# Altium PCB BeaglePhone_Rev1_PCB.PcbDoc
Units mil, origin at the board's own origin, x right, y up, seen from the top; angles counter-clockwise.
Board outline 2150 x 3400 mil, 4 copper layers (Top Layer, GND1, GND2, Bottom Layer); 59 components, 47 nets, 301 pads, 43 vias.
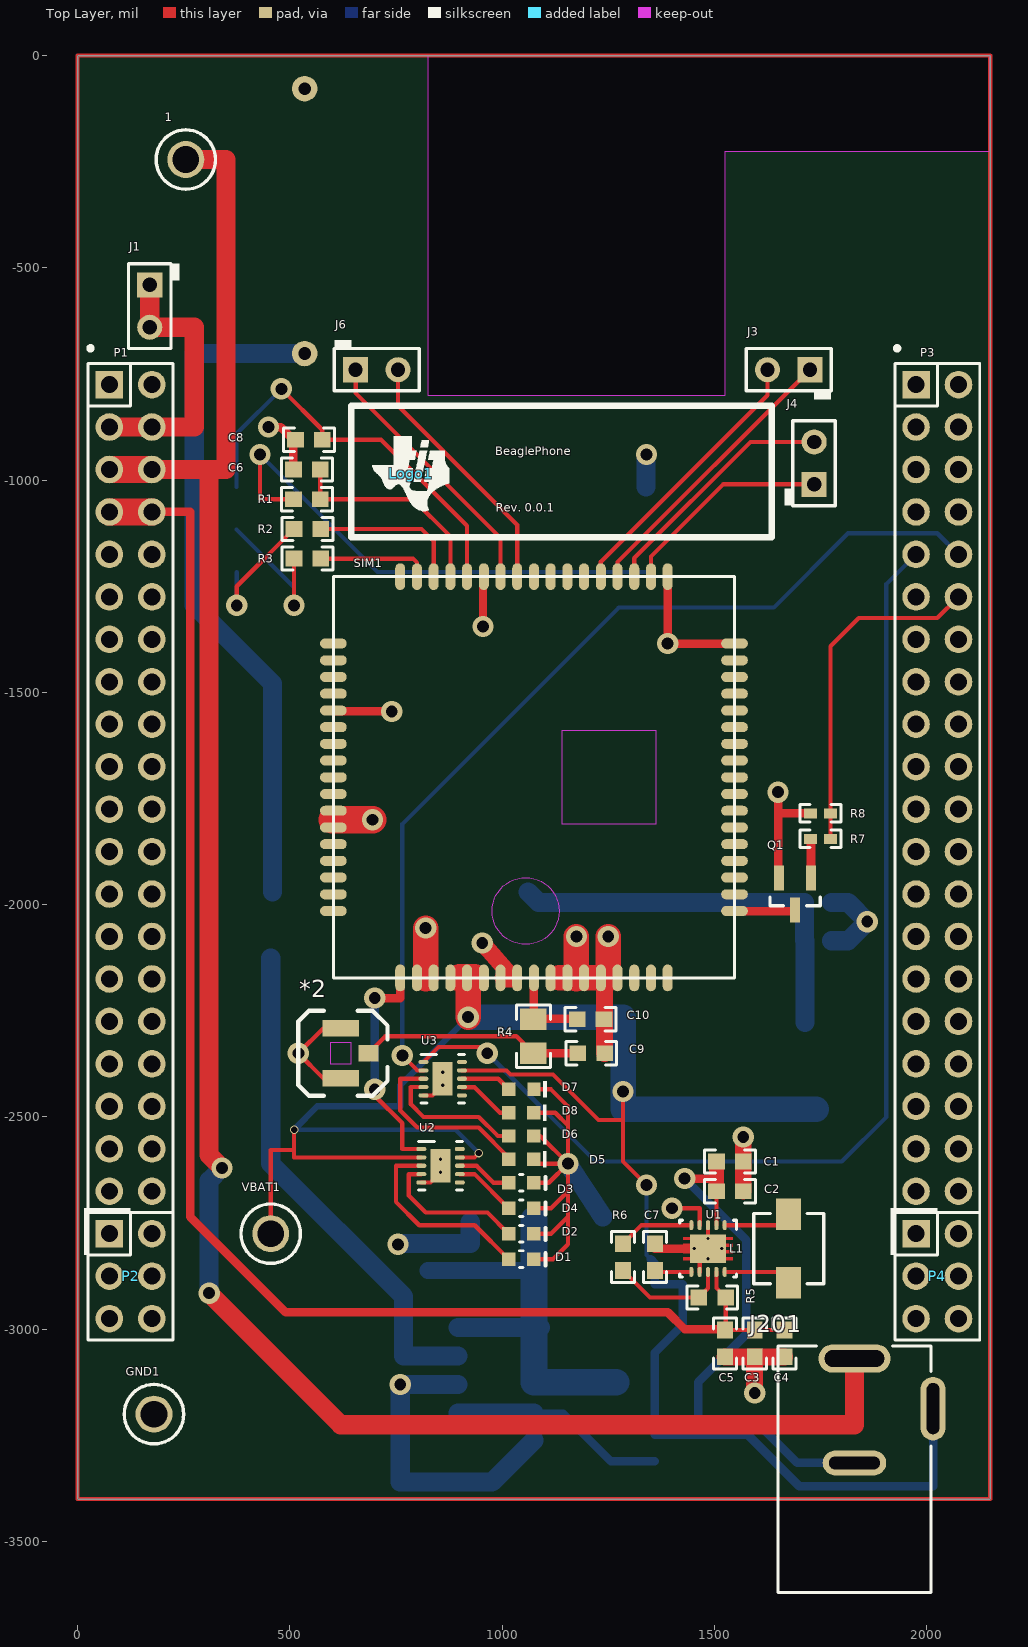
[diagram p0: Top Layer view]
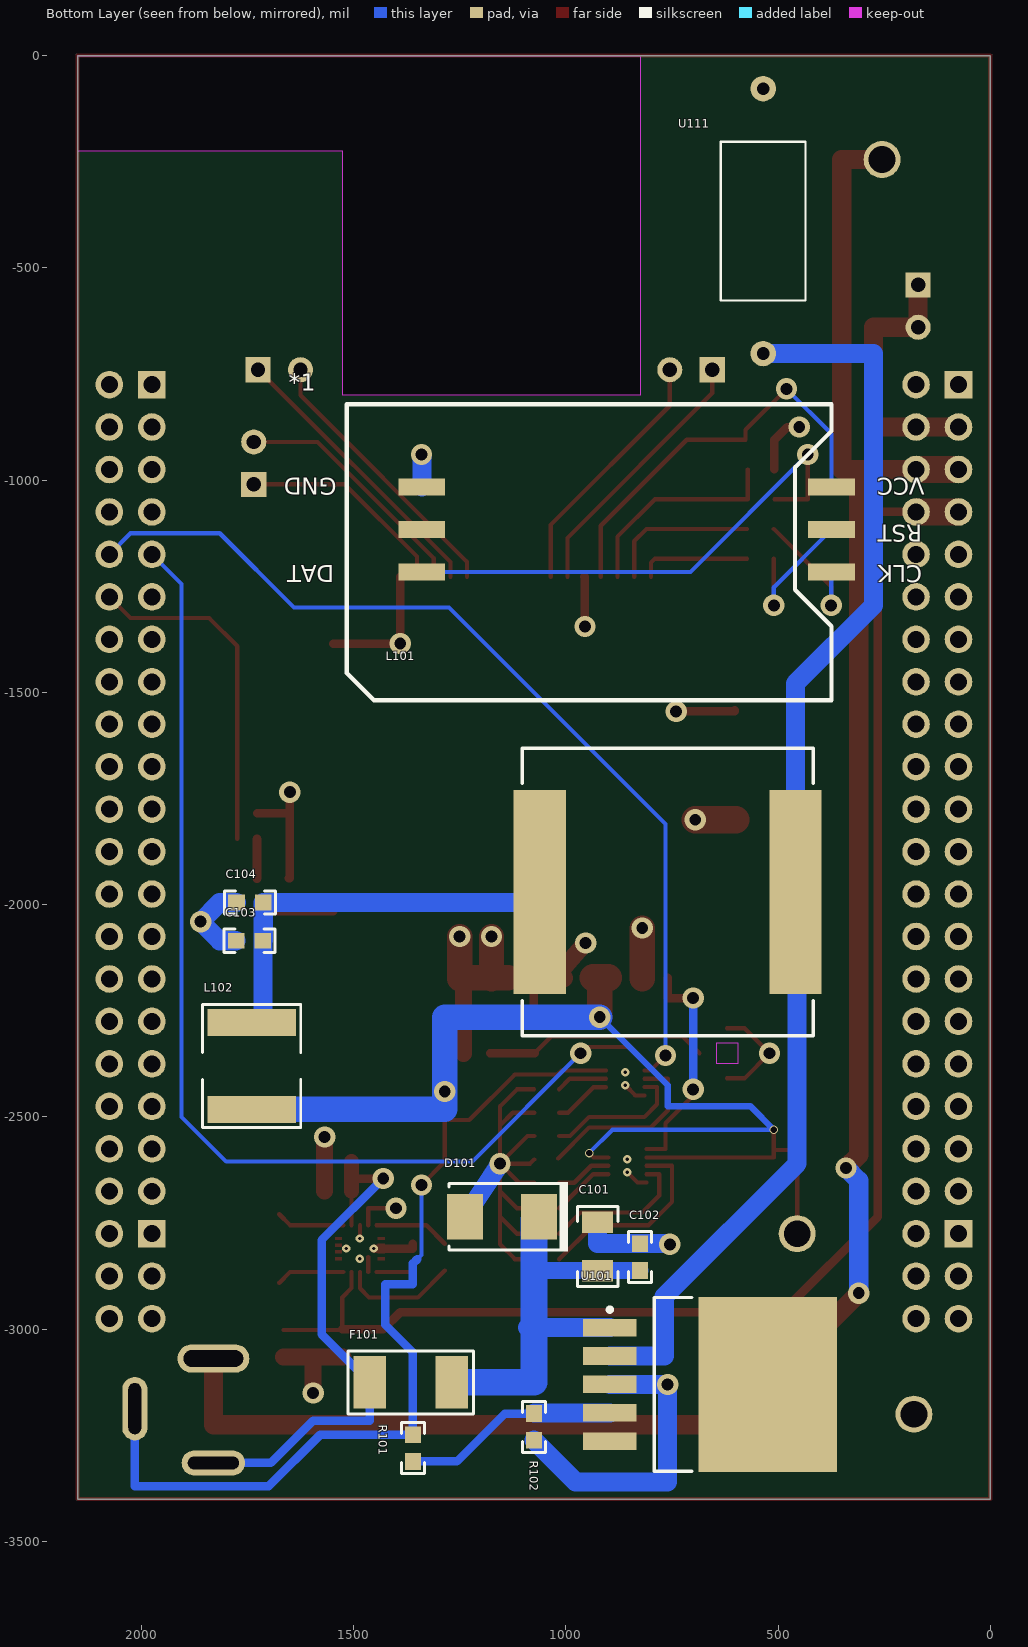
[diagram p1: Bottom Layer view, seen from below]
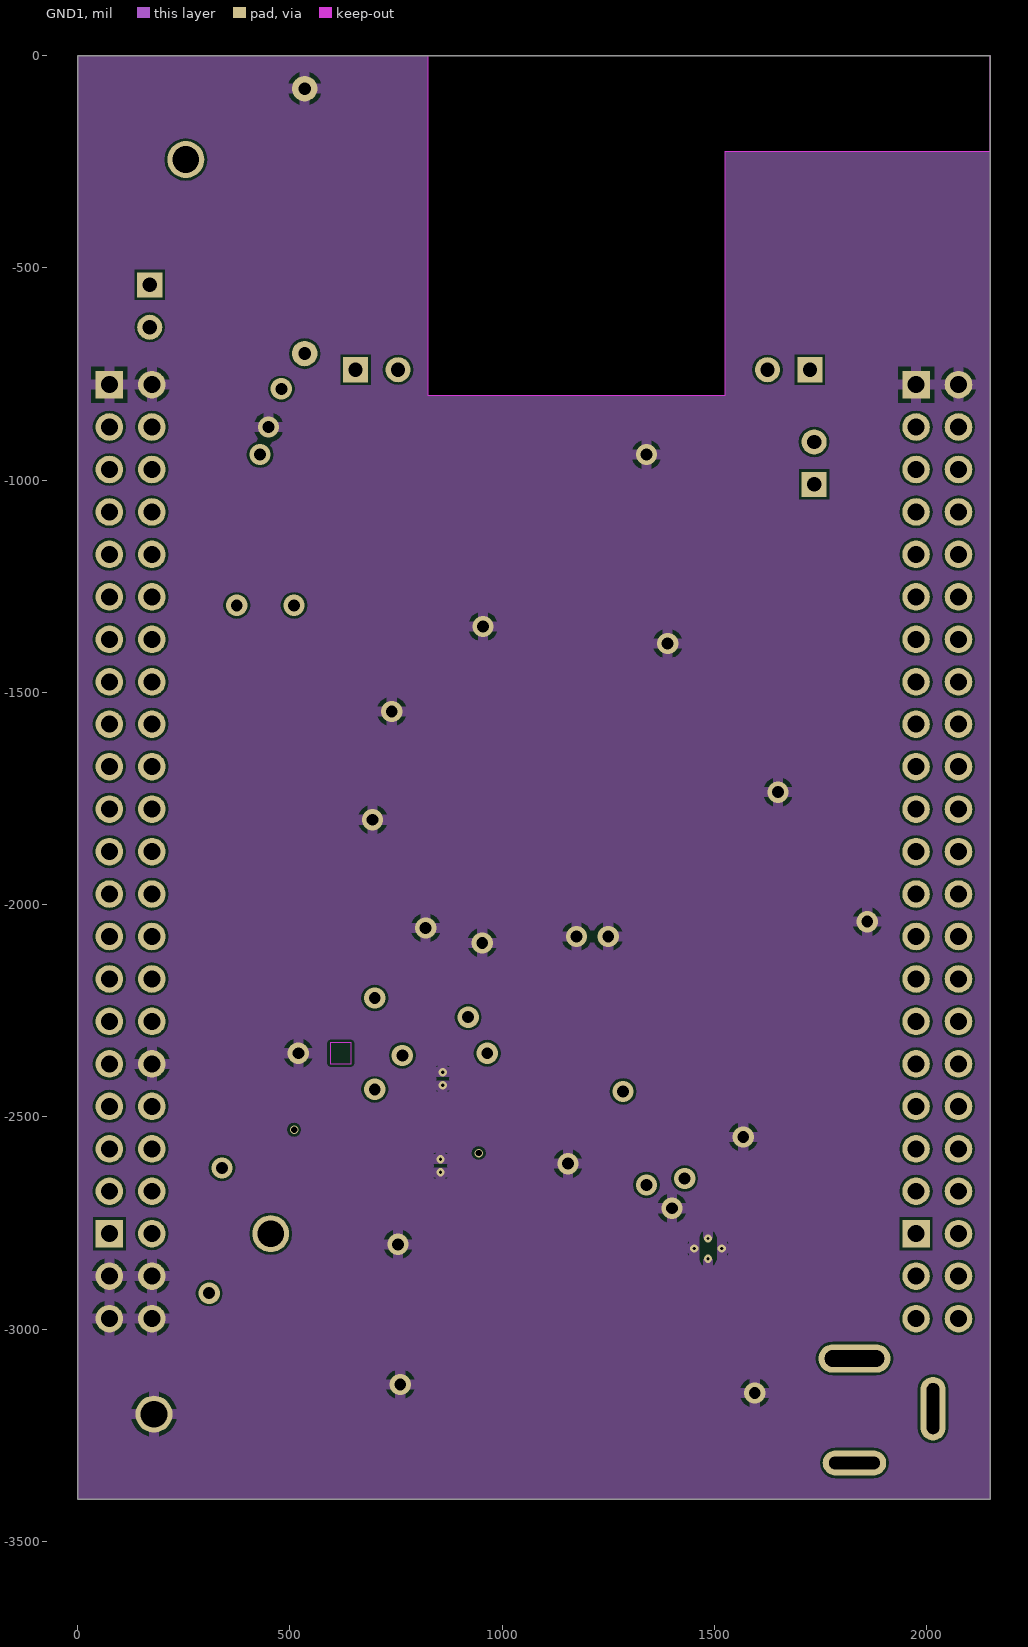
[diagram p2: GND1]
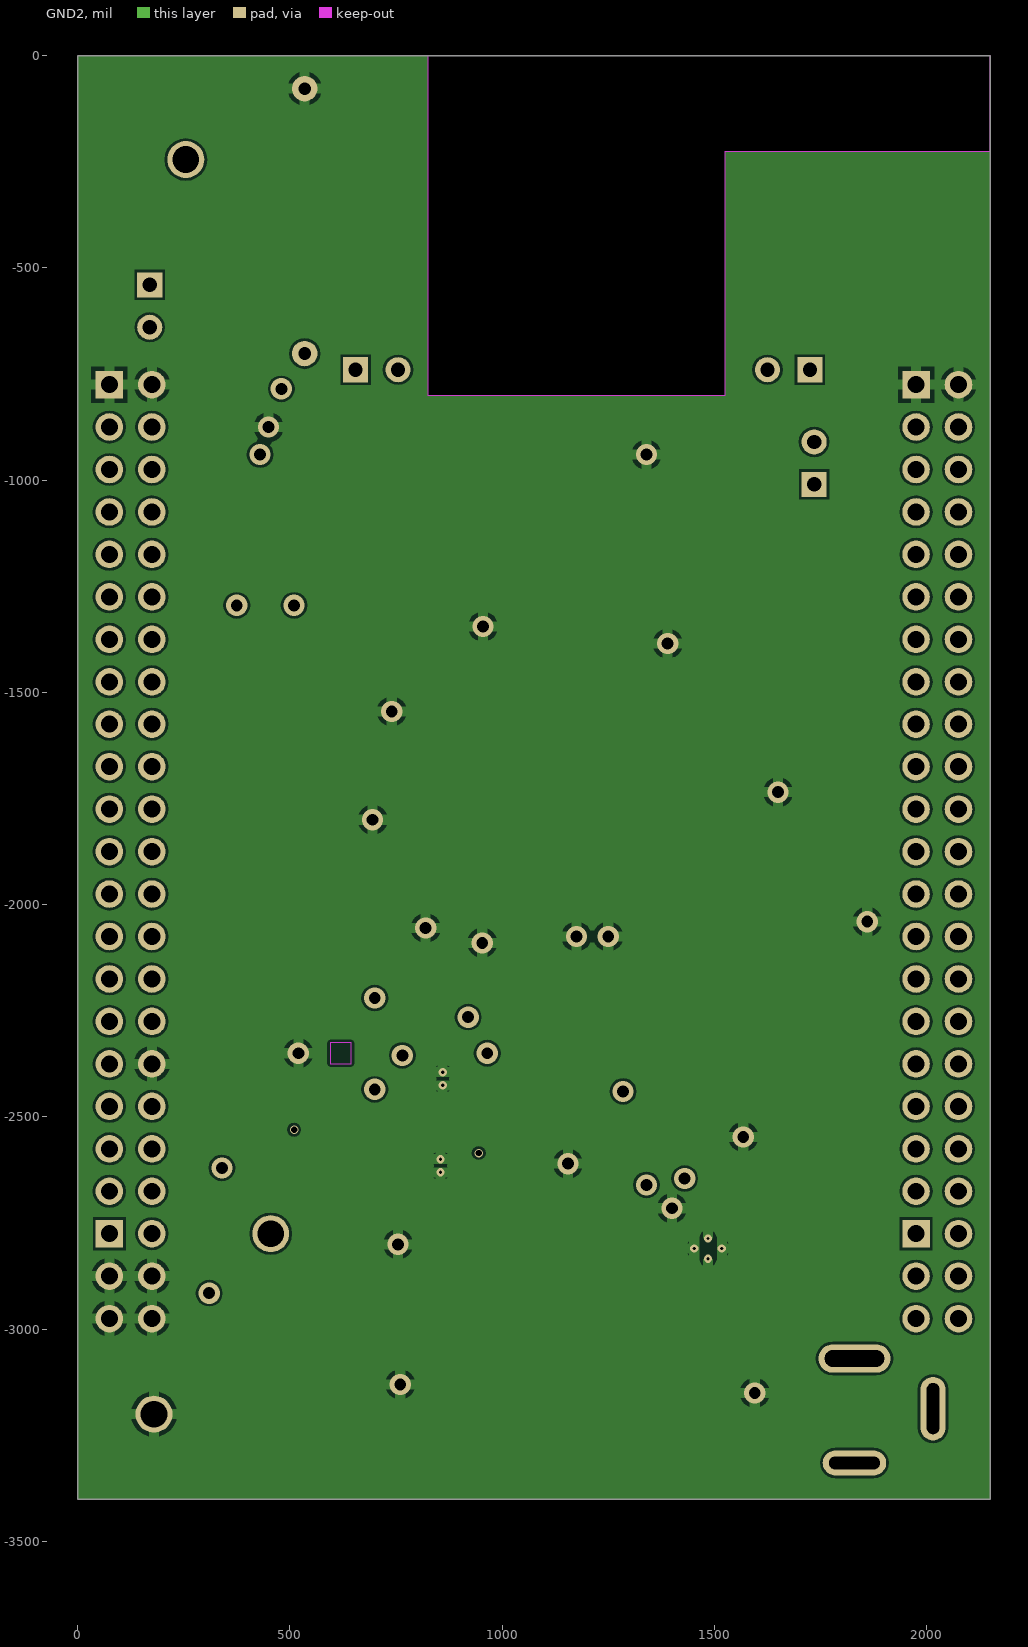
[diagram p3: GND2]

## Layer stack, top to bottom
Top Layer: signal copper 1.4
Dielectric: core 12.6, FR-4, Dk 4.8
GND1: signal copper 1.4
Dielectric: prepreg 12.6, FR-4, Dk 4.8
GND2: signal copper 1.4
Dielectric: core 12.6, FR-4, Dk 4.8
Bottom Layer: signal copper 1.4

## Board outline
0,-3400 0,0 2150,0 2150,-3400
cut-out: 825,0 825,-800 1525,-800 1525,-225 2150,-225 2150,0

## Design rules (kind name [scope] priority, off if disabled: settings)
AssemblyTestPointUsage [All] p1 off:
AssemblyTestpoint [All] p1 off: testpointundercomponent=TRUE minsize=40 maxsize=100 preferedsize=60 minholesize=0 maxholesize=40 preferedholesize=32 testpointgrid=1 usegrid=TRUE gridtolerance=0.01 allowsidetop=TRUE allowsidebottom=TRUE
Clearance [All] p1: gap=6
ComponentClearance [All] p1 off: gap=10 collisioncheckmode=3 verticalgap=10 showdistances=FALSE
DiffPairsRouting [All] p1 off: maxlimit=10 minlimit=10 mostfreqgap=10 maxuncoupledlength=500
FabricationTestPointUsage TestPointUsage [All] p1 off: valid=0 allowmultiple=FALSE
FabricationTestpoint Testpoint [All] p1 off: side=3 testpointundercomponent=TRUE minsize=40 maxsize=100 preferedsize=60 minholesize=0 maxholesize=40 preferedholesize=32 testpointgrid=1 allowsidetop=TRUE allowsidebottom=TRUE usegrid=TRUE gridtolerance=0.01
FanoutControl Fanout_BGA [IsBGA] p1 off: bgadir=Out bgaviamode=Centered fanoutstyle=Auto fanoutdirection=Alternating viagrid=1 // Fanout_BGA (Default Rule)
FanoutControl Fanout_LCC [IsLCC] p2 off: bgadir=Out bgaviamode=Centered fanoutstyle=Auto fanoutdirection=Alternating viagrid=1 // Fanout_LCC (Default Rule)
FanoutControl Fanout_SOIC [IsSOIC] p3 off: bgadir=Out bgaviamode=Centered fanoutstyle=Auto fanoutdirection=Alternating viagrid=1 // Fanout_SOIC (Default Rule)
FanoutControl Fanout_Small [(CompPinCount < 5)] p4 off: bgadir=Out bgaviamode=Centered fanoutstyle=Auto fanoutdirection=OutThenIn viagrid=1 // Fanout_Small (Default Rule)
FanoutControl Fanout_Default [All] p5 off: bgadir=Out bgaviamode=Centered fanoutstyle=Auto fanoutdirection=Alternating viagrid=1 // Fanout_Default (Default Rule)
Height [All] p1 off: minheight=0 maxheight=1000 prefheight=500
HoleSize [All] p1: absolutevalues=TRUE maxlimit=400 minlimit=15 maxpercent=80.000 minpercent=20.000
HoleToHoleClearance [All] p1: gap=8 allowstackedmicrovias=TRUE
LayerPairs [All] p1 off: enforce=FALSE
MinimumSolderMaskSliver [All] p1: minsoldermaskwidth=4
PolygonConnect [All] p1: connectstyle=Relief reliefconductorwidth=25 reliefentries=4 polygonreliefangle="90 Angle" airgapwidth=10
RoutingVias [All] p1: holewidth=15 width=25 viastyle="Through Hole" minholewidth=15 minwidth=25 maxholewidth=400 maxwidth=500
SilkToSilkClearance [All] p1: silktosilkclearance=5
SilkscreenOverComponentPads [All] p1: minsilkscreentomaskgap=5
SolderMaskExpansion [All] p1: expansion=2
Width [All] p1: maxlimit=100 minlimit=6 preferedwidth=10
10 further rules are at their usual default settings.

## Classes and differential pairs
component class Logo: Logo1
component class Header: P1 P2 P3 P4

## Components (designator, comment, footprint, x,y, rotation, side; value= is the part's Value field where it differs from the comment)
1 "5005" Keystone5005 255,-245 r90 top
*1 "sim_holder" SIM_socket 945,-1170 r0 bottom
*2 "ipx" IPX_U.FL 620,-2350 r90 top
C1 "C1608X5R1A106M" 0603 1536.5,-2605 r180 top
C2 "C1608X5R1A106M" 0603 1536.5,-2675 r180 top
C3 "C1608X5R0G226M080AA" 0603 1595,-3033.5 r90 top
C4 "C1608X5R0G226M080AA" 0603 1665,-3033.5 r90 top
C5 "C1608X5R0G226M080AA" 0603 1525,-3033.5 r90 top
C6 "GRM1885C2A220JA01D" 0603 540,-975 r180 top
C7 "C0603X104K3RACTU" 0603 1360,-2830 r90 top
C8 "06035C104KAT2A" 0603 545,-905 r180 top
C9 "C0603C109C5GACTU" 0603 1210,-2350 r0 top
C10 "C0603C109C5GACTU" 0603 1208.5,-2270 r0 top
C101 "GRM31CR60J107ME39L" 1206 925,-2805 r90 bottom
C102 "GRM188R61A105KA61D" 0603 825,-2830 r90 bottom
C103 "GRM188R71H332KA01D" 0603 1745,-2085 r0 bottom
C104 "C0603X104K4RACTU" 0603 1744.06,-1995 r0 bottom
D1 "LG L29K-G2J1-24-Z" "LG L29K_GREEN" 1045,-2835 r0 top
D2 "LG L29K-G2J1-24-Z" "LG L29K_GREEN" 1045,-2775 r0 top
D3 "LG L29K-G2J1-24-Z" "LG L29K_GREEN" 1045,-2655 r0 top
D4 "LG L29K-G2J1-24-Z" "LG L29K_GREEN" 1045,-2715 r0 top
D5 "LB Q39G-L2N2-35-1" "LB Q39G_BLUE" 1045,-2600 r0 top
D6 "LB Q39G-L2N2-35-1" "LB Q39G_BLUE" 1045,-2545 r0 top
D7 "LB Q39G-L2N2-35-1" "LB Q39G_BLUE" 1045.47,-2435 r0 top
D8 "LB Q39G-L2N2-35-1" "LB Q39G_BLUE" 1045,-2490 r0 top
D101 "SMBJ15A-13-F" SMB 1150,-2735 r0 bottom
F101 "0452005." SloBlo452 1365,-3125 r0 bottom
GND1 "5006" Keystone5006 180,-3200 r90 top
J1 "800-10-002-10-001000" Mill-Max_800-10-002-10-001000 170,-590 r270 top
J3 "800-10-002-10-001000" Mill-Max_800-10-002-10-001000 1675,-740 r180 top
J4 "800-10-002-10-001000" Mill-Max_800-10-002-10-001000 1735,-960 r90 top
J6 "800-10-002-10-001000" Mill-Max_800-10-002-10-001000 705,-740 r0 top
J201 "RAPC722X" CONN_RAPC722X 1830,-3610 r270 top
L1 "SRP4012-1R0M" SRP4012 1675,-2810 r270 top
L101 "IHLP6767GZER101M11" IHLP-6767GZ-11 760,-1970 r0 bottom
L102 "HI2220P271R-10" 2220 1740,-2380 r270 bottom
Logo1 "Texas Instruments" TI_Symbol_Overlay_Small 785,-985 r0 top
P1 "Comment" TSW-120-07-G-D 125,-1725 r270 top locked
P2 "Comment" SULLINS_PEC03DAAN 125,-2875 r270 top locked
P3 "Comment" TSW-120-07-G-D 2025,-1725 r270 top locked
P4 "Comment" SULLINS_PEC03DAAN 2025,-2875 r270 top locked
Q1 "MMBT2222LT1G" SOT-23 1690,-1975 r270 top
R1 "CRCW060322R0JNEA" 0603 540,-1045 r180 top
R2 "CRCW060322R0JNEA" 0603 541.5,-1115 r0 top
R3 "CRCW060322R0JNEA" 0603 541.5,-1185 r0 top
R4 "CRCW08050000Z0EAHP" 0805_HV 1073.5,-2310 r90 top
R5 "CRCW06031M00FKEA" 0603 1495,-2925 r0 top
R6 "RT0603BRD07111KL" 0603 1285,-2830 r270 top
R7 "CRCW04024K70JNED" 0402 1750,-1845 r180 top
R8 "CRCW04024K70JNED" 0402 1750,-1785 r0 top
R101 "CRCW06032K20JNEA" 0603 1360,-3280 r90 bottom
R102 "CRCW06031K00JNEA" 0603 1075,-3230 r90 bottom
SIM1 "SIM900" "PCBComponent_1 - duplicate1" 1075,-1700 r180 top
U1 "TPS63061DSC" DSC0010E 1485,-2810 r270 top
U2 "TPS75105DSKR" DSK0010A 855,-2615 r0 top
U3 "TPS75105DSKR" DSK0010A 860,-2410 r0 top
U101 "LM2596S-ADJ" TS5B_N 660,-3130 r180 bottom
U111 "Used in BOM report" "PCBComponent_1 - duplicate2" 535,-390 r270 bottom
VBAT1 "5005" Keystone5005 455,-2775 r90 top

## Footprints (in the part's own frame and the unit in brackets; to place one, negate y for a bottom-side part, rotate by r counter-clockwise, add the part's x,y. Pads: shape width x height; smd on the part's side, far side on the other; paste and mask are expansions set on the pad)
0402 [mm] "0402 from SM-752 data"
  rect 0.8x0.6 smd: 1(-0.6,0) 2(0.6,0)
  silkscreen extent -1.22,-0.52 1.22,0.52, body extent -0.55,-0.3 0.55,0.3, height 0.6
0603 [mm] "0603 from SM-752 data"
  rect 1x0.95 smd: 1(-0.8,0) 2(0.8,0)
  silkscreen extent -1.52,-0.69 1.52,0.69, body extent -0.87,-0.47 0.87,0.47, height 0.85
0805_HV [mil] "0805 with 30mil clearance between pads"
  rect 50x63 smd: 1(-40,0) 2(40,0)
  silkscreen extent -74,-40 74,40, body extent -43,-29 43,29, height 43
1206 [mm] "1206 from SM-752 data"
  rect 1.3x1.85 smd: 1(-1.45,0) 2(1.45,0)
  silkscreen extent -2.4,-1.21 2.4,1.21, body extent -1.7,-0.9 1.7,0.9, height 1.35
2220 [mm] "Chip Capacitor, Body 5.7x5.0mm, IPC Medium Density"
  rect 1.6x5.3 smd: 1(-2.6,0) 2(2.6,0)
  silkscreen extent -3.69,-2.94 3.69,2.94, body extent -2.95,-2.62 2.95,2.62, height 1.35
CONN_RAPC722X [mm] "Conn_DC Jack"
  oval 1.7x4.3 hole 1.01 slot 3.56 at 90 deg: 1(-13.741,0)
  oval 1.5x3.8 hole 0.76 slot 3.05 at 90 deg: 2(-7.493,0)
  oval 3.8x1.5 hole 0.76 slot 3.05 at 0 deg: 3(-10.744,4.7)
  silkscreen extent -14.48,-4.57 0.25,4.57, body extent -14.5,-4.57 0.23,4.83, height 11.18
DSC0010E [mm]
  oval 0.6x0.24 smd: 1(-1.4,1) 2(-1.4,0.5) 3(-1.4,0) 4(-1.4,-0.5) 5(-1.4,-1) 6(1.4,-1) 7(1.4,-0.5) 8(1.4,0) 9(1.4,0.5) 10(1.4,1)
  rect 1.7x2.15 smd paste-1: 11(0,0)
  Top Layer region: -0.7,-1.5 -0.5,-1.5 -0.5,-1.06 -0.7,-1.06
  Top Layer region: -0.3,-1.5 -0.1,-1.5 -0.1,-1.06 -0.3,-1.06
  Top Layer region: 0.3,-1.06 0.1,-1.06 0.1,-1.5 0.3,-1.5
  Top Layer region: 0.7,-1.06 0.5,-1.06 0.5,-1.5 0.7,-1.5
  Top Layer region: 0.7,1.5 0.5,1.5 0.5,1.06 0.7,1.06
  Top Layer region: 0.3,1.5 0.1,1.5 0.1,1.06 0.3,1.06
  Top Layer region: -0.3,1.06 -0.1,1.06 -0.1,1.5 -0.3,1.5
  Top Layer region: -0.7,1.06 -0.5,1.06 -0.5,1.5 -0.7,1.5
  silkscreen extent -1.7,-1.7 1.7,1.7, body extent -1.58,-1.58 1.58,1.58, height 0.81
DSK0010A [mm] "SON, 10-Leads, Body 2.5x2.5mm, Pitch 0.5mm, Thermal Pad 2x1.2mm - ADI"
  oval 0.6x0.25 smd: 1(-1.15,1) 2(-1.15,0.5) 3(-1.15,0) 4(-1.15,-0.5) 5(-1.15,-1) 6(1.15,-1) 7(1.15,-0.5) 8(1.15,0) 9(1.15,0.5) 10(1.15,1)
  rect 1.2x2 smd paste-0.6: 11(0,0)
  silkscreen extent -1.3,-1.45 1.3,1.45, body extent -1.3,-1.3 1.3,1.3, height 0.81
IHLP-6767GZ-11 [mm] "Vishay Dale"
  rect 3.125x12.19 smd: 1(-7.65,0) 2(7.65,0)
  silkscreen extent -8.7,-8.6 8.7,8.6, body extent -8.64,-8.57 8.64,8.57, height 7
IPX_U.FL [mm]
  rect 1x2.2 smd: 1(-1.5,0) 2(1.5,0)
  rect 1x1.2 smd: 3(0,-1.651)
  Keep-Out Layer region: -0.635,-0.635 0.635,-0.635 0.635,0.635 -0.635,0.635
  silkscreen extent -2.54,-2.79 2.54,2.54
Keystone5005 [mil] "Keystone Compact loops"
  round 87 hole 63: 1(0,0)
  silkscreen extent -70,-70 70,70, body extent -63,-63 62,63, height 225
Keystone5006 [mil] "Keystone Compact loops"
  round 87 hole 63: 1(0,0)
  silkscreen extent -70,-70 70,70, body extent -63,-63 62,63, height 225
"LB Q39G_BLUE" [mm] "OSRAM"
  rect 0.8x0.8 smd: 1(-0.75,0) 2(0.75,0)
  silkscreen extent 1.3,-0.5 1.52,0.5, body extent -0.85,-0.45 0.85,0.45, height 0.4
"LG L29K_GREEN" [mm] "OSRAM"
  rect 0.8x0.8 smd paste-0.4: 1(-0.75,0) 2(0.75,0)
  silkscreen extent -0.1,-0.5 1.45,0.5, body extent -0.9,-0.45 0.9,0.45, height 0.67
Mill-Max_800-10-002-10-001000 [mm] "Mill-Max"
  rect 1.5x1.5 hole 0.85: 1(-1.27,0)
  round 1.5 hole 0.85: 2(1.27,0)
  silkscreen extent -2.54,-1.27 2.54,1.78, body extent -2.54,-1.27 2.54,1.27, height 8.13
"PCBComponent_1 - duplicate1" [mm]
  oval 1.6x0.6 smd: 1(-12,8) 2(-12,7) 3(-12,6) 4(-12,5) 5(-12,4) 6(-12,3) 7(-12,2) 8(-12,1) 9(-12,0) 10(-12,-1) 11(-12,-2) 12(-12,-3) 13(-12,-4) 14(-12,-5) 15(-12,-6) 16(-12,-7) 17(-12,-8) 35(12,-8) 36(12,-7) 37(12,-6) 38(12,-5) 39(12,-4) 40(12,-3) 41(12,-2) 42(12,-1) 43(12,0) 44(12,1) 45(12,2) 46(12,3) 47(12,4) 48(12,5) 49(12,6) 50(12,7) 51(12,8)
  oval 0.6x1.6 smd: 18(-8,-12) 19(-7,-12) 20(-6,-12) 21(-5,-12) 22(-4,-12) 23(-3,-12) 24(-2,-12) 25(-1,-12) 26(0,-12) 27(1,-12) 28(2,-12) 29(3,-12) 30(4,-12) 31(5,-12) 32(6,-12) 33(7,-12) 34(8,-12) 52(8,12) 53(7,12) 54(6,12) 55(5,12) 56(4,12) 57(3,12) 58(2,12) 59(1,12) 60(0,12) 61(-1,12) 62(-2,12) 63(-3,12) 64(-4,12) 65(-5,12) 66(-6,12) 67(-7,12) 68(-8,12)
  Top Layer keep-out region: -7.3,-2.8 -7.3,2.8 -1.7,2.8 -1.7,-2.8
  Top Layer keep-out region: -1.5,8 -1.5,8 -1.348,8.765 -0.914,9.414 -0.265,9.848 0.5,10 0.5,10 1.265,9.848 1.914,9.414 2.348,8.765 2.5,8 2.5,8 2.348,7.235 1.914,6.586 1.265,6.152 0.5,6 0.5,6 0.5,6 -0.265,6.152 -0.914,6.586 -1.348,7.235 -1.5,8
  silkscreen extent -12,-12 12,12
"PCBComponent_1 - duplicate2" [mil]
  round 60 hole 30: 1(312,0) 2(-312,0)
  silkscreen extent -187,-100 187,100
SIM_socket [mm]
  rect 2.8x1 smd: 1(10.011,-3.9) 2(10.011,-1.36) 3(10.011,1.18) 4(-14.5,1.18) 5(-14.5,-1.36) 6(-14.5,-3.9)
  silkscreen extent -14.5,-8.85 14.5,8.85
SloBlo452 [mm] "Littelfuse 452/4 Fuses, recommended land pattern"
  rect 1.96x3.15 smd: 1(-2.455,0) 2(2.455,0)
  silkscreen extent -3.75,-1.88 3.75,1.9, body extent -3.05,-1.35 3.05,1.34, height 2.69
SMB [mil] "Molded Diode, 2-Leads, Body 5.4x3.6mm, IPC Medium Density, based on OnSemi component dimensions"
  rect 85x107.99 smd: 1(-87.01,0) 2(87.01,0)
  silkscreen extent -155,-82 125,82, body extent -106,-71 106,71, height 91
SOT-23 [mm] "SOT23, 3-Leads, Body 2.9x1.3mm, Pitch 0.95mm, Lead Span 2.5mm, IPC Medium Density"
  rect 1.5x0.6 smd: 1(-0.95,0.95) 2(-0.95,-0.95) 3(0.95,0)
  silkscreen extent 0.2,-1.5 0.7,1.5, body extent -1.16,-1.45 1.21,1.45, height 1
SRP4012 [mm] "BOURNS"
  rect 1.9x1.5 smd: 1(-2.05,0) 2(2.05,0)
  silkscreen extent -2.1,-2.1 2.1,2.1, body extent -2.1,-2.1 2.1,2.1, height 1.2
SULLINS_PEC03DAAN [mm] "SULLINS"
  rect 1.65x1.65 hole 1.016 mask+0: 1(-2.54,-1.27)
  round 1.65 hole 1.016 mask+0: 2(-2.54,1.27) 3(0,-1.27) 4(0,1.27) 5(2.54,-1.27) 6(2.54,1.27)
  silkscreen extent -4.06,-2.79 3.81,2.54, body extent -3.81,-2.54 3.81,2.54, height 8.38
TI_Symbol_Overlay_Small [mil]
  silkscreen extent -90,-88 91,88
TS5B_N [mm] "D2-PAK, 6-Leads, Body 8.6x10.2mm, Pitch 1.7mm, Lead Span 14.1mm, IPC Medium Density"
  rect 3.2x1.05 smd: 1(-6,3.4) 2(-6,1.7) 3(-6,0) 4(-6,-1.7) 5(-6,-3.4)
  rect 8.3x10.45 smd: 6(3.45,0)
  silkscreen extent -6.13,-5.2 -1.1,5.2, body extent -3.35,-5.2 6.05,5.2, height 4.65
TSW-120-07-G-D [mm] "Samtec 100mil, 2x20, 230 mil above insulator"
  rect 1.65x1.65 hole 1.016 mask+0: 1(-24.13,-1.27)
  round 1.65 hole 1.016 mask+0: 2(-24.13,1.27) 3(-21.59,-1.27) 4(-21.59,1.27) 5(-19.05,-1.27) 6(-19.05,1.27) 7(-16.51,-1.27) 8(-16.51,1.27) 9(-13.97,-1.27) 10(-13.97,1.27) 11(-11.43,-1.27) 12(-11.43,1.27) 13(-8.89,-1.27) 14(-8.89,1.27) 15(-6.35,-1.27) 16(-6.35,1.27) 17(-3.81,-1.27) 18(-3.81,1.27) 19(-1.27,-1.27) 20(-1.27,1.27) 21(1.27,-1.27) 22(1.27,1.27) 23(3.81,-1.27) 24(3.81,1.27) 25(6.35,-1.27) 26(6.35,1.27) 27(8.89,-1.27) 28(8.89,1.27) 29(11.43,-1.27) 30(11.43,1.27) 31(13.97,-1.27) 32(13.97,1.27) 33(16.51,-1.27) 34(16.51,1.27) 35(19.05,-1.27) 36(19.05,1.27) 37(21.59,-1.27) 38(21.59,1.27) 39(24.13,-1.27) 40(24.13,1.27)
  silkscreen extent -26.42,-2.54 25.4,2.54, body extent -25.4,-2.54 25.4,2.54, height 8.38

## Part data
1 VBAT1: "Test Point, TH, Compact, Red"
C1 C2: "CAP, CERM, 10uF, 10V, +/-20%, X5R, 0603"
C3 C4 C5: "CAP, CERM, 22uF, 4V, +/-20%, X5R, 0603"
C6: "CAP, CERM, 22pF, 100V, +/-5%, C0G/NP0, 0603"
C7: "CAP, CERM, 0.1uF, 25V, +/-10%, X7R, 0603"
C8: "CAP, CERM, 0.1 µF, 50 V, +/- 10%, X7R, 0603"
C9 C10: "CAP, CERM, 1pF, 50V, +/-25%, C0G/NP0, 0603"
C101: "CAP, CERM, 100uF, 6.3V, +/-20%, X5R, 1206"
C102: "CAP, CERM, 1uF, 10V, +/-10%, X5R, 0603"
C103: "CAP, CERM, 3300pF, 50V, +/-10%, X7R, 0603"
C104: "CAP, CERM, 0.1uF, 16V, +/-10%, X7R, 0603"
D1 D2 D3 D4: "LED, Green, SMD"
D5 D6 D7 D8: "LED, Blue, SMD"
D101: "Diode, TVS, Uni, 15V, 600W, SMB"
F101: "Fuse, 5A, 125V, SMD"
GND1: "Test Point, TH, Compact, Black"
J1 J3 J4 J6: "Header, 2x1, 100mil, SMT"
J201: "Power Jack, mini, 2.1mm OD, R/A, TH"
L1: "Inductor, Flat Wire, Powdered Iron, 1uH, 4.8A, 0.0336 ohm, SMD"
L101: "Inductor, Shielded, Powdered Iron, 100uH, 4A, 0.11 ohm, SMD"
L102: "Ferrite Bead, 270 ohm @ 100MHz, 4A, 2220"
Logo1: library part TI_Logo, "Texas Instrument Corporate Signature"
P1 P3: library part TSW-120-07-G-D, "Header, 100mil, 20x2, Gold, TH"
P2 P4: library part PEC03DAAN, "Header, 100mil, 3x2, Tin, TH"
Q1: library part "MMBT2222LT1G, ON Semiconductor", "Transistor, NPN, 30V, 0.6A, SOT-23"
R1 R2 R3: "RES, 22 ohm, 5%, 0.1W, 0603"
R4: "RES, 0 ohm, 5%, 0.333W, 0805"
R5: "RES, 1.00Meg ohm, 1%, 0.1W, 0603"
R6: "RES, 111k ohm, 0.1%, 0.1W, 0603"
R7 R8: "RES, 4.7 k, 5%, 0.063 W, 0402"
R101: "RES, 2.2k ohm, 5%, 0.1W, 0603"
R102: "RES, 1.0k ohm, 5%, 0.1W, 0603"
U1: "HIGH INPUT VOLTAGE BUCK-BOOST CONVERTER WITH 2A SWITCH CURRENT, DSC0010E"
U2 U3: "Low Dropout, Two-Bank LED Driver with PWM Brightness Control, 2.7 to 5.5 V, -40 to 85 degC, 10-pin SON (DSK10), Green (RoHS & no Sb/Br)"
U101: "SIMPLE SWITCHER® Power Converter 150 KHz 3A Step-Down Voltage Regulator, 5-pin TO-263"
U111: library part MBR360

## Via types
v1: diameter 50, hole 28, Top Layer to Bottom Layer, tented both sides, 30 vias
v2: diameter 19.68, hole 7.87, Top Layer to Bottom Layer, 8 vias
v3: diameter 50, hole 28, Top Layer to Bottom Layer, 3 vias
v4: diameter 20, hole 15, Top Layer to Bottom Layer, tented both sides, 2 vias

## Nets (pads, with @x,y where several pads share a name; then routed paths per layer and width w, separated by ;. In a path a pad name is that pad's centre, name@x,y a point inside that pad or via, vN(x,y) a via of type N, cw(c..) or ccw(c..) an arc to the next point about the centre after c; other vN are vias at no path point)
BBB_RXD: P1.11
BBB_TXD: P1.13
DBG_RXD: J6.1 SIM1.28 | length 628.9
  Top Layer w10: J6.1 655,-795 996.26,-1136.26 SIM1.28
DBG_TXD: J6.2 SIM1.27 | length 603.8
  Top Layer w10: J6.2 755,-825 1035.63,-1105.63 SIM1.27
DGND: *1.1 *2.1 *2.2 C1.1 C2.1 C3.1 C4.1 C5.1 C6.2 C7.2 C8.2 C9.2 C10.2 C101.2 C102.2 C103.2 C104.2 D1.2 D2.2 D3.2 D4.2 D5.2 D6.2 D7.2 D8.2 D101.2 GND1.1 P1.1 P1.2 P1.34 P2.3 P2.4 P2.5 P2.6 P3.1 P3.2 Q1.2 R8.1 R102.1 SIM1.17 SIM1.18 SIM1.29 SIM1.39 SIM1.45 SIM1.46 SIM1.53 SIM1.54 SIM1.58 SIM1.59 SIM1.61 SIM1.62 SIM1.63 SIM1.64 SIM1.65 U1.3 U1.4 U1.7 U1.11 U2.5 U2.11 U3.5 U3.11 U101.3 U111.2 | length 5292.2
  Top Layer w10: *2.1 579.06,-2409.06 v1(520,-2350) 579.06,-2290.94 *2.2 ; U2.5 831.13,-2654.37 v2(855,-2630.5) ; U3.5 836.13,-2449.37 v2(860,-2425.5) ; D1.2 1120,-2835 1155,-2800 1155,-2735 ; D2.2 1115,-2775 1155,-2735 ; D4.2 1115,-2715 1155,-2675 ; D3.2 1110,-2655 v1(1155,-2610) ; D5.2 1084.53,-2610 v1(1155,-2610) ; D6.2 1090,-2545 v1(1155,-2610) ; D8.2 1125,-2490 1155,-2520 ; D7.2 1115,-2435 1155,-2475 1155,-2520 ; v1(1400,-2715) 1465.31,-2715 U1.4 ; U1.7 U1.11@1465.31,-2829.68 ; v2(1485,-2786.38) U1.3 ; 1155,-2735 1155,-2675 ; 1155,-2675 v1(1155,-2610) ; v1(1155,-2610) 1155,-2520
  Top Layer w20: v1(450,-875) 478.5,-875 508.5,-905 C6.2 ; SIM1.39 602.56,-1545 v1(740,-1545) ; v1(955,-1345) 955,-1227.56 SIM1.29 ; C7.2 1360,-2810 v2(1452.52,-2810) ; SIM1.18 v3(1390,-1385) SIM1.17 ; v1(1650,-1735) 1650,-1785 ; Q1.2 1650,-1937.6 1650,-1785 ; R8.1 1650,-1785
  Top Layer w40: v1(953.19,-2090) SIM1.59@1025,-2172.44 ; SIM1.64 1241.5,-2181.46 C9.2 ; C5.1 C3.1 ; C2.1 C1.1 v1(1567.99,-2547.01) ; v3(1595,-3150) C3.1 ; C4.1 C3.1
  Top Layer w45: SIM1.58@1005,-2172.44 SIM1.59@1025,-2172.44
  Top Layer w60: 820,-2175 v1(820,-2055) ; 1135,-2172.44 SIM1.62 1175,-2172.44 ; 1175,-2175 1175,-2172.44 ; v1(1175,-2075) 1175,-2172.44 ; 1247.44,-2172.44 SIM1.64 SIM1.63 1175,-2172.44 ; 1250,-2175 v1(1250,-2075)
  Top Layer w65: 600,-1800 v1(695,-1800)
  Bottom Layer w45: v1(755,-2800) 755,-2798.5 C102.2 925,-2798.5 C101.2 ; U101.3 v1(760,-3130) 760,-3360 976.5,-3360 R102.1 ; v1(1155,-2610) D101.2 ; *1.1 v1@1339.13,-940.87 ; C104.2 1815,-1995 v1(1860,-2040) 1815,-2085 C103.2
  other v1: 1340,-940
  other v2: 1485,-2833.62 1517.48,-2810 855,-2599.5 860,-2394.5
GPIO44: P3.12 R7.1 R8.2 | length 803.2
  Top Layer w10: R7.1 R8.2 1773.62,-1391.38 1840,-1325 2025,-1325 P3.12
GPIO67: P3.8
GPIO68: P3.10 U3.2 | length 2223.8
  Top Layer w10: v1(765,-2355) 800.31,-2390.31 U3.2
  Bottom Layer w10: v1(765,-2355) 765,-1810 1275,-1300 1640,-1300 1815,-1125 2025,-1125 P3.10
GPIO69: P3.9 U3.1 | length 2614.4
  Top Layer w10: U3.1 850.35,-2335 950,-2335 v1(965,-2350)
  Bottom Layer w10: v1(965,-2350) 1220,-2605 1420,-2605 1800,-2605 1905,-2500 1905,-1245 P3.9
MIC_N: J4.2 SIM1.20 | length 581
  Top Layer w10: SIM1.20 1311.22,-1183.78 1585,-910 J4.2
MIC_P: J4.1 SIM1.19 | length 502.4
  Top Layer w10: SIM1.19 1350.59,-1180 1520.59,-1010 J4.1
Net*1_3: *1.3 R1.2 | length 1207.2
  Top Layer w10: v1(430,-940) 430,-1045 R1.2
  Bottom Layer w10: v1(430,-940) 706.46,-1216.46 *1.3
Net*1_4: *1.4 R2.1 | length 313.6
  Top Layer w10: v1(375,-1295) 375,-1250 R2.1
  Bottom Layer w10: v1(375,-1295) *1.4@375,-1217.32
Net*1_5: *1.5 R3.1 | length 344.8
  Top Layer w10: v1(510,-1295) R3.1
  Bottom Layer w10: *1.5 510,-1252.32 v1(510,-1295)
Net*2_3: *2.3 C9.1 R4.1 | length 526.6
  Top Layer w10: *2.3 725,-2310 1033.5,-2310 R4.1
  Top Layer w20: R4.1 C9.1
NetC1_2: C1.2 C2.2 F101.2 J201.2 U1.2 | length 1311.3
  Top Layer w10: U1.2 C2.2@1504.69,-2675.31
  Top Layer w20: v1(1430,-2645) 1505,-2645
  Top Layer w35: C2.2 1505,-2645 C1.2
  Bottom Layer w20: v1(1430,-2645) 1575,-2790 1575,-3011.65 F101.2 1461.65,-3215 1595,-3215 1695,-3315 J201.2
NetC7_1: C7.1 U1.6 | length 82
  Top Layer w10: C7.1@1363.62,-2865.12 U1.6
NetC101_1: C101.1 C102.1 D101.1 F101.1 U101.1 | length 1013.6
  Bottom Layer w40: C102.1 1068.5,-2861.5
  Bottom Layer w45: U101.1 1090,-2996.14
  Bottom Layer w63: D101.1@1075,-2742.01 1075,-3125 F101.1
NetC103_1: C103.1 C104.1 L101.2 L102.1 | length 943.4
  Bottom Layer w45: L101.2 1086.18,-1995 C104.1 C103.1@1712.56,-2084.06 ; L102.1@1713.5,-2277.64 C103.1
NetD1_1: D1.1 U2.3 | length 466.1
  Top Layer w10: U2.3 750,-2615 750,-2700 805,-2755 935.47,-2755 D1.1
NetD2_1: D2.1 U2.4 | length 352.8
  Top Layer w10: U2.4 780,-2634.68 780,-2685 820,-2725 965.47,-2725 D2.1
NetD3_1: D3.1 U2.8 | length 131.8
  Top Layer w10: U2.8 940,-2615 980,-2655 D3.1
NetD4_1: D4.1 U2.7 | length 148.5
  Top Layer w10: U2.7 935.16,-2634.68 D4.1
NetD5_1: D5.1 U3.3 | length 434.2
  Top Layer w10: U3.3 760,-2410 760,-2485 800,-2525 945,-2525 D5.1@1017.74,-2597.74
NetD6_1: D6.1 U3.4 | length 331.6
  Top Layer w10: U3.4 785,-2429.68 785,-2470 815,-2500 945,-2500 990,-2545 D6.1
NetD7_1: D7.1 U3.8 | length 121
  Top Layer w10: U3.8 990.94,-2410 D7.1
NetD8_1: D8.1 U3.7 | length 134.7
  Top Layer w10: U3.7@905.59,-2430 935,-2430 995,-2490 D8.1
NetL1_1: L1.1 U1.1 | length 161.2
  Top Layer w10: U1.1 1649.41,-2754.88 L1.1
NetL1_2: L1.2 U1.10 | length 161.2
  Top Layer w10: U1.10 1649.41,-2865.12 L1.2
NetL101_1: L101.1 U101.2 U111.1 | length 2798.9
  Bottom Layer w45: L101.1@455,-2126.18 455,-2610 768.07,-2923.07 768.07,-3063.07 U101.2 ; L101.1 458.82,-1478.82 275,-1295 275,-702 U111.1
NETLIGHT: SIM1.52 U2.1 | length 534.9
  Top Layer w10: v1(700,-2435) 700,-2450 765,-2515 765,-2575.63 U2.1
  Top Layer w20: v1(700,-2220) 760.04,-2220 SIM1.52
  Bottom Layer w20: v1(700,-2435) v1(700,-2220)
NetQ1_1: Q1.1 R7.2 | length 91.6
  Top Layer w22: Q1.1 R7.2@1727.4,-1846.02
NetR5_1: R5.1 R6.2 U1.8 | length 273.6
  Top Layer w10: R6.2 1348.5,-2925 R5.1 1485,-2903.5 U1.8
NetR6_1: R6.1 U1.5 | length 178.7
  Top Layer w10: R6.1 1328.62,-2754.88 U1.5
NetR101_1: R101.1 R102.2 U101.4 | length 510.6
  Bottom Layer w20: R102.2 1143.5,-3198.5 1256.5,-3311.5 R101.1
  Bottom Layer w45: U101.4 R102.2@1075,-3196.93
PWRKEY: Q1.3 SIM1.1 | length 138.6
  Top Layer w20: SIM1.1 1682.44,-2014.96 Q1.3@1685,-2012.4
RF_ANT: C10.1 R4.2 SIM1.60 | length 196.6
  Top Layer w20: SIM1.60 1075,-2268.5 C10.1@1175.51,-2268.5
SIM_CLK: R2.2 SIM1.32 | length 361.5
  Top Layer w10: R2.2 810,-1115 838.78,-1143.78 SIM1.32
SIM_DATA: C6.1 R1.1 SIM1.31 | length 507.6
  Top Layer w10: C6.1 R1.1 790,-1045 878.15,-1133.15 SIM1.31
SIM_RST: R3.2 SIM1.33 | length 263.5
  Top Layer w10: R3.2 790,-1185 799.41,-1194.41 SIM1.33
SIM_VDD: *1.6 C8.1 SIM1.30 | length 980.2
  Top Layer w10: v1(480,-785) 576.5,-881.5 C8.1 715,-905 917.52,-1107.52 SIM1.30
  Bottom Layer w10: *1.6 374.13,-890.87 v1(480,-785)
SPK_N: J3.2 SIM1.22 | length 650.1
  Top Layer w10: SIM1.22 1232.48,-1192.52 1625,-800 J3.2
SPK_P: J3.1 SIM1.21 | length 675.3
  Top Layer w10: SIM1.21 1271.85,-1193.15 J3.1
SYS_5V: C3.2 C4.2 C5.2 P1.7 P1.8 R5.2 U1.9 | length 3505
  Top Layer w10: U1.9 1504.69,-2903.19 R5.2 1526.5,-3000.51 1527.99,-3002.01 C3.2 C4.2
  Top Layer w20: P1.8 265,-1075 265,-2735 490,-2960 1390,-2960 1430.51,-3000.51 C5.2@1526.5,-3000.51
  Top Layer w63: P1.7 P1.8
VBAT: J201.3 L102.2 R101.2 SIM1.55 SIM1.56 SIM1.57 U2.2 U2.9 U3.9 VBAT1.1 | length 5084.1
  Top Layer w10: VBAT1.1 455,-2577.6 507.91,-2577.6 ; v4(510,-2530) 510,-2595.31 U2.2 ; U2.9 934.69,-2595.31 v4(945,-2585) ; U3.9 1010.31,-2390.31 1020,-2400 1120,-2400 1227.24,-2507.24 1285,-2507.24 ; v1(1285,-2440) 1285,-2507.24 ; v1(1340,-2660) 1285,-2605 1285,-2507.24
  Top Layer w60: v3(920,-2265) SIM1.56@920,-2172.44
  Top Layer w65: 900,-2172.44 935,-2172.44
  Bottom Layer w10: v4(510,-2530) 890,-2530 v4(945,-2585) ; v1(1340,-2660) 1340,-2825 1350,-2835
  Bottom Layer w15: v4(510,-2530) 565,-2475 760,-2475 760,-2425 v3(920,-2265)
  Bottom Layer w20: 1350,-2835 1360,-2845 1360,-2893.5 1425,-2893.5 1425,-2990 1360,-3055 R101.2 1578.5,-3248.5 1700,-3370 2015.04,-3370 J201.3
  Bottom Layer w60: v3(920,-2265) 1285,-2265 v1(1285,-2440) 1285,-2482.36 L102.2
VDD_3V3B: J1.1 J1.2 P1.3 P1.4 | length 640
  Top Layer w45: P1.3 P1.4 275,-875 275,-640 J1.2 J1.1
VDD_5V: 1.1 J201.1 P1.5 P1.6 | length 4869.3
  Top Layer w45: P1.6 310,-975 ; 1.1 350,-245 350,-975 310,-975 ; v1(310,-2915) 620,-3225 1830,-3225 J201.1 ; v1(340,-2620) 310,-2590 310,-975
  Top Layer w63: P1.5 P1.6
  Bottom Layer w45: v1(310,-2915) 310,-2650 v1(340,-2620)
pads on no net: *1.2 P1.9 P1.10 P1.12 P1.14 P1.15 P1.16 P1.17 P1.18 P1.19 P1.20 P1.21 P1.22 P1.23 P1.24 P1.25 P1.26 P1.27 P1.28 P1.29 P1.30 P1.31 P1.32 P1.33 P1.35 P1.36 P1.37 P1.38 P1.39 P1.40 P2.1 P2.2 P3.3 P3.4 P3.5 P3.6 P3.7 P3.11 P3.13 P3.14 P3.15 P3.16 P3.17 P3.18 P3.19 P3.20 P3.21 P3.22 P3.23 P3.24 P3.25 P3.26 P3.27 P3.28 P3.29 P3.30 P3.31 P3.32 P3.33 P3.34 P3.35 P3.36 P3.37 P3.38 P3.39 P3.40 P4.1 P4.2 P4.3 P4.4 P4.5 P4.6 SIM1.2 SIM1.3 SIM1.4 SIM1.5 SIM1.6 SIM1.7 SIM1.8 SIM1.9 SIM1.10 SIM1.11 SIM1.12 SIM1.13 SIM1.14 SIM1.15 SIM1.16 SIM1.23 SIM1.24 SIM1.25 SIM1.26 SIM1.34 SIM1.35 SIM1.36 SIM1.37 SIM1.38 SIM1.40 SIM1.41 SIM1.42 SIM1.43 SIM1.44 SIM1.47 SIM1.48 SIM1.49 SIM1.50 SIM1.51 SIM1.66 SIM1.67 SIM1.68 U2.6 U2.10 U3.6 U3.10 U101.5 U101.6
copper on no net: | length 11100
  Top Layer w10: 0,-3400 2150,-3400 2150,0 0,0 0,-3400

## Polygon pours and split planes (outlines as drawn)
DGND on GND1 "GND1-No Net" (solid, remove dead copper, pour order 6): 0,0 0,-3400 2150,-3400 2150,0
DGND on GND2 "GND2-No Net" (solid, remove dead copper, pour order 8): 0,-3400 0,0 2145,0 2150,0 2150,-3400

## Silkscreen, mask and mechanical layers (free items; w line width, h text height)
Top Overlay:
  lines w15: 645,-1135 645,-825 1635,-825 1635,-1135 645,-1135
  text "BeaglePhone" at 984,-942 h20
  text "Rev. 0.0.1" at 985,-1075 h20

## Text inside footprints (layer, text, board x,y; h text height)
*1: Bottom Overlay "GND" at 1540,-995 h39.37 r180; Bottom Overlay "DAT" at 1545,-1200 h39.37 r180; Bottom Overlay "VCC" at 155,-995 h39.37 r180; Bottom Overlay "RST" at 160,-1105 h39.37 r180; Bottom Overlay "CLK" at 160,-1200 h39.37 r180
J201: Mechanical 1 "BOARD EDGE" at 1655,-3675 h35